# Altium PCB prnet_v04_adxl362.PcbDoc
Units mil, origin at the board's own origin, x right, y up, seen from the top; angles counter-clockwise.
Board outline 1235 x 1305 mil, 2 copper layers (Top Layer, Bottom Layer); 4 components, 11 nets, 43 pads, 9 vias.
Unrouted connection lines stored in the file: 3.
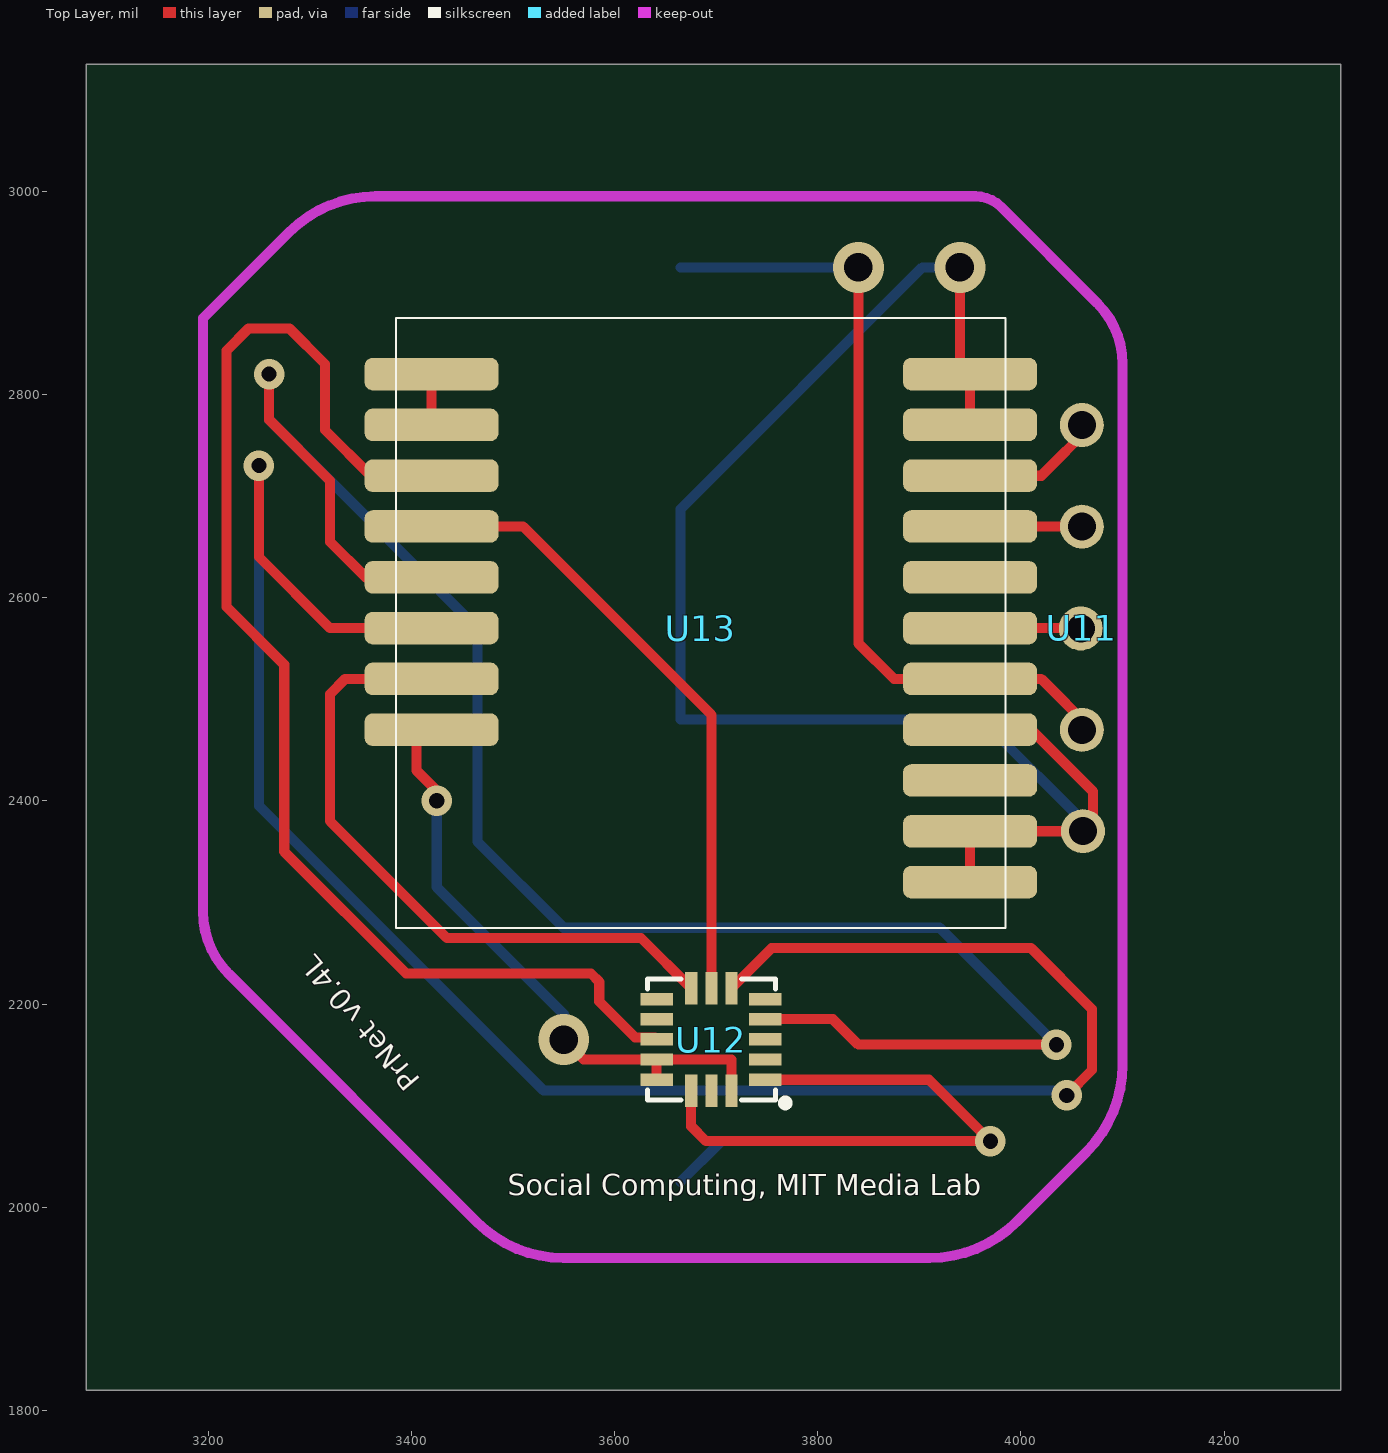
[diagram p0: Top Layer view]
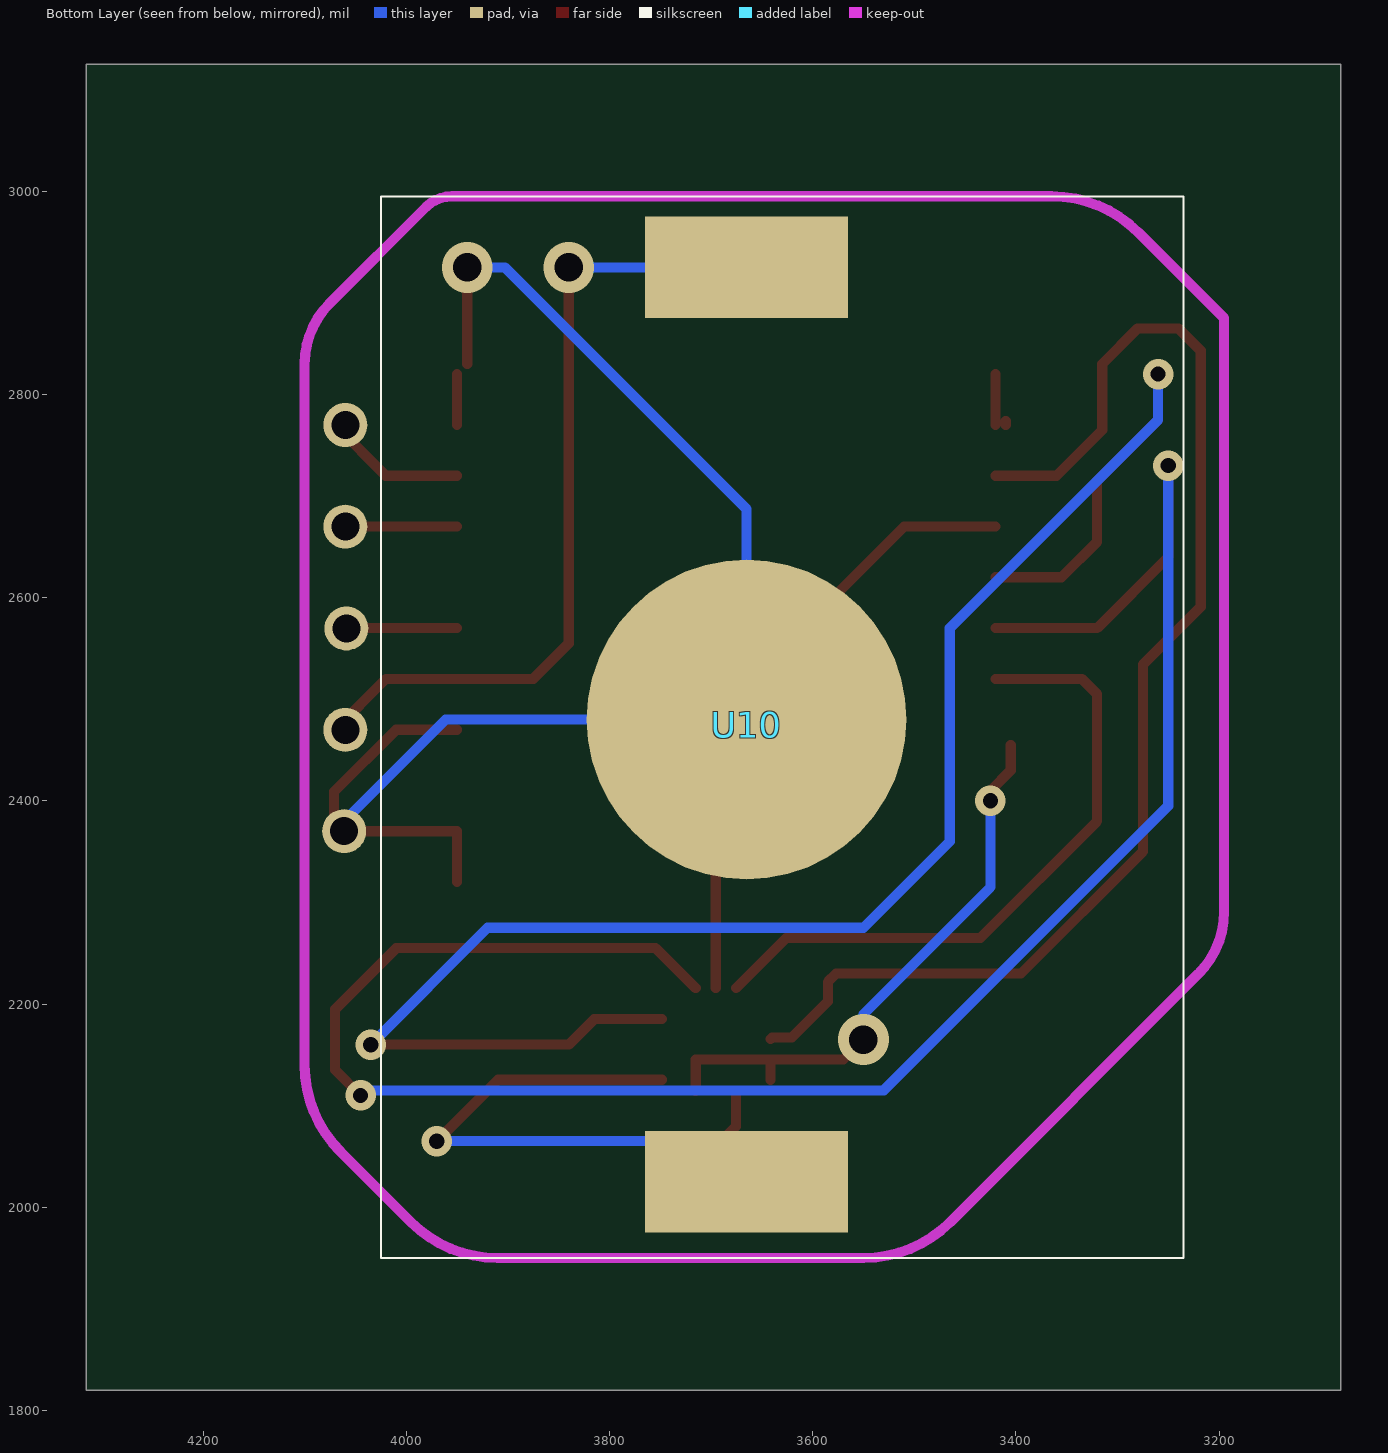
[diagram p1: Bottom Layer view, seen from below]

## Layer stack, top to bottom
Top Solder: solder mask 0.4, Solder Resist, Dk 3.5
Top Layer: signal copper 1.4
Dielectric 1: dielectric 12.6, FR-4, Dk 4.8
Bottom Layer: signal copper 1.4
Bottom Solder: solder mask 0.4, Solder Resist, Dk 3.5

## Board outline
3080,1820 4315,1820 4315,3125 3080,3125

## Design rules (kind name [scope] priority, off if disabled: settings)
Clearance [All] p1: gap=7
HoleSize [All] p1: absolutevalues=TRUE maxlimit=100 minlimit=13 maxpercent=80.000 minpercent=20.000
MinimumAnnularRing [All] p1: minimumring=7
MinimumSolderMaskSliver [All] p1: minsoldermaskwidth=6
PolygonConnect [All] p1: connectstyle=Relief reliefconductorwidth=10 reliefentries=4 polygonreliefangle="90 Angle" airgapwidth=10
RoutingVias [All] p1: holewidth=28 width=50 viastyle="Through Hole" minholewidth=28 minwidth=50 maxholewidth=28 maxwidth=50
SilkToSolderMaskClearance [IsPad] p1: minsilkscreentomaskgap=7 clearancetoexposedcopper=TRUE
SolderMaskExpansion [All] p1: expansion=4
Width [All] p1: maxlimit=10 minlimit=10 preferedwidth=10
27 further rules are at their usual default settings.

## Classes and differential pairs
component class prnet_v04_adxl362: U10 U11 U13

## Components (designator, comment, footprint, x,y, rotation, side; value= is the part's Value field where it differs from the comment)
U10 "Coin Cell Holder" CoinCell 3665,2475 r270 bottom
U11 "Programmer Header" PrgHeader 4060,2570 r90 top
U12 "ADXL362" ADXL362 3695,2165 r180 top
U13 "RFD22301 module" RFD22301 3685,2570 r0 top

## Footprints (in the part's own frame and the unit in brackets; to place one, negate y for a bottom-side part, rotate by r counter-clockwise, add the part's x,y. Pads: shape width x height; smd on the part's side, far side on the other; paste and mask are expansions set on the pad)
ADXL362 [mil]
  rect 32x12 smd paste+0 mask+1: 1(-53.57,39.6) 2(-53.57,19.6) 3(-53.57,-0.4) 4(-53.57,-20.09) 5(-53.57,-39.77) 9(53.57,-39.77) 10(53.57,-20.09) 11(53.57,-0.4) 12(53.57,19.6) 13(53.57,39.6)
  rect 12x32 smd paste+0 mask+1: 6(-20.11,-50.6) 7(-0.43,-50.6) 8(19.57,-50.6) 14(19.57,50.6) 15(-0.43,50.6) 16(-20.11,50.6)
  silkscreen extent -75,-59 63,65
CoinCell [mm] "coin cell holder"
  rect 2.54x5.08 smd: 1(-11.43,0) 3(11.43,0)
  round 8 smd: 2(-0.127,0)
  silkscreen extent -13.21,-9.14 13.34,10.92
PrgHeader [mm] "5 pin programmer header for RFD22301"
  round 1.1 hole 0.7: 1(-5.077,-0.027) 2(-2.543,0) 3(-0.009,0.027) 4(2.537,0) 5(5.077,0)
RFD22301 [mil] "RFD22301 module 0.6x0.6 inches"
  rrect50% 132x32 smd: 1(-265,250) 2(-265,200) 3(-265,150) 4(-265,100) 5(-265,50) 6(-265,0) 7(-265,-50) 8(-265,-100) 9(265,-250) 10(265,-200) 11(265,-150) 12(265,-100) 13(265,-50) 14(265,0) 15(265,50) 16(265,100) 17(265,150) 18(265,200) 19(265,250)
  silkscreen extent -300,-295 300,305

## Part data
U10: library part CoinCellHolder
U11: library part Component_1
U13: library part RFD22301_Footprint

## Via types
v1: diameter 30, hole 15, Top Layer to Bottom Layer, 6 vias
v2: diameter 50, hole 28, Top Layer to Bottom Layer, 3 vias

## Nets (pads, with @x,y where several pads share a name; then routed paths per layer and width w, separated by ;. In a path a pad name is that pad's centre, name@x,y a point inside that pad or via, vN(x,y) a via of type N, cw(c..) or ccw(c..) an arc to the next point about the centre after c; other vN are vias at no path point)
CS: U12.8 U13.7 | length 654.7
  Top Layer w10: U13.7 3335,2520 3320,2505 3320,2380 3435,2265 3626.02,2265 U12.8
GND: U10.2 U11.1 U12.12 U12.13 U12.16 U13.1 U13.2 U13.8 U13.9 U13.10 U13.12 U13.18 U13.19 | length 2161.4
  Top Layer w10: U13.8@3405,2455 3405,2430 3425,2410 v1(3425,2400) ; U13.2@3410,2770 U13.2@3410,2773.82 ; U13.2 U13.1 ; v2(3550,2165) 3569.6,2145.4 U12.12 ; U12.13 U12.12 ; U12.16 3715.11,2145.4 U12.12 ; U13.19@3940,2830 v2(3940,2925) ; U13.9 U13.10 U11.1@4070.95,2370 ; U13.12 4010,2470 4071.06,2408.94 U11.1@4071.06,2370.12 ; U13.18 U13.19
  Bottom Layer w10: v1(3425,2400) 3425,2315 3550,2190 v2(3550,2165) ; v2(3940,2925) 3903,2925 3665,2687 U10.2 3961.18,2480 U11.1@4071.06,2370.12
INT1: U12.11 U13.3 | length 1280
  Top Layer w10: U13.3 3360,2720 3315,2765 3315,2830 3280,2865 3240,2865 3218,2843 3218,2590.96 3275,2533.96 3275,2350 3395,2230 3576.83,2230 3585,2221.83 3585,2202.54 3620.46,2167.09 3639.74,2167.09 U12.11
INT2: U12.9
MISO: U12.7 U13.4 | length 621.2
  Top Layer w10: U13.4 3510,2670 3695.43,2484.57 U12.7
MOSI: U12.6 U13.6 | length 2021.4
  Top Layer w10: v1(3250,2730) 3250,2640 3320,2570 U13.6 ; U12.6 3754.51,2255 4010,2255 4070,2195 4070,2135 v1(4045,2110)
  Bottom Layer w10: v1(3250,2730) 3250,2395 3530,2115 v1@4040,2115
RESET: U11.3 U13.14 | length 118.6
  Top Layer w10: U13.14 U11.3@4068.58,2570
RX: U11.5 U13.17 | length 140.7
  Top Layer w10: U13.17 4020.12,2720 U11.5@4070,2769.88
SCLK: U12.4 U13.5 | length 1798.9
  Top Layer w10: v1(3260,2820) 3260,2775 3320,2715 3320,2655 3355,2620 U13.5 ; U12.4 3814.91,2185.09 3840,2160 v1(4035,2160)
  Bottom Layer w10: v1(3260,2820) 3260,2775 3465,2570 3465,2360 3550,2275 3920,2275 v1(4035,2160)
TX: U11.4 U13.16 | length 119.9
  Top Layer w10: U13.16 U11.4@4069.88,2670
VCC: U10.1 U10.3 U11.2 U12.1 U12.14 U13.13 | length 1713.7
  Top Layer w10: U12.14 3675.43,2079.57 3690,2065 v1(3970,2065) 3909.6,2125.4 U12.1 ; v2(3840,2925) 3840,2555 3875,2520 U13.13 4019.88,2520 U11.2@4070,2469.88
  Bottom Layer w10: U10.3 3705,2065 v1(3970,2065) ; U10.1 v2(3840,2925)
pads on no net: U12.2 U12.3 U12.5 U12.10 U12.15 U13.11 U13.15

## Keep-outs
Keep-Out Layer:
  lines w10: 3195,2290.86 ccw(c3281.57,2290.86) 3220.36,2229.64 3464.64,1985.36 ccw(c3550,2070.71) 3550,1950 3905,1950 3910,1950 ccw(c3910,2070.71) 3995.36,1985.36 4064.64,2054.64 ccw(c3979.29,2140) 4100,2140 4100,2160 4100,2830 ccw(c4015.5,2830) 4075.25,2889.75 3980.61,2984.39 ccw(c3955,2958.79) 3955,2995 3365,2995 ccw(c3365,2874.29) 3279.64,2959.64 3195,2875 3195,2310 3195,2290.86

## Silkscreen, mask and mechanical layers (free items; w line width, h text height)
Top Overlay:
  text "PrNet v0.4L" at 3415,2130 h35 r130
  text "Social Computing, MIT Media Lab" at 3495,2005 h35